# Altium PCB ADCS Subsystem_AVR.PcbDoc
Units mm, origin at the board's own origin, x right, y up, seen from the top; angles counter-clockwise.
Board outline 95.45 x 90.3 mm, 4 copper layers (Top Layer, Ground, Power, Bottom Layer), stack 1.641 mm thick; 83 components, 66 nets, 417 pads, 0 vias.
Unrouted connection lines stored in the file: 173.
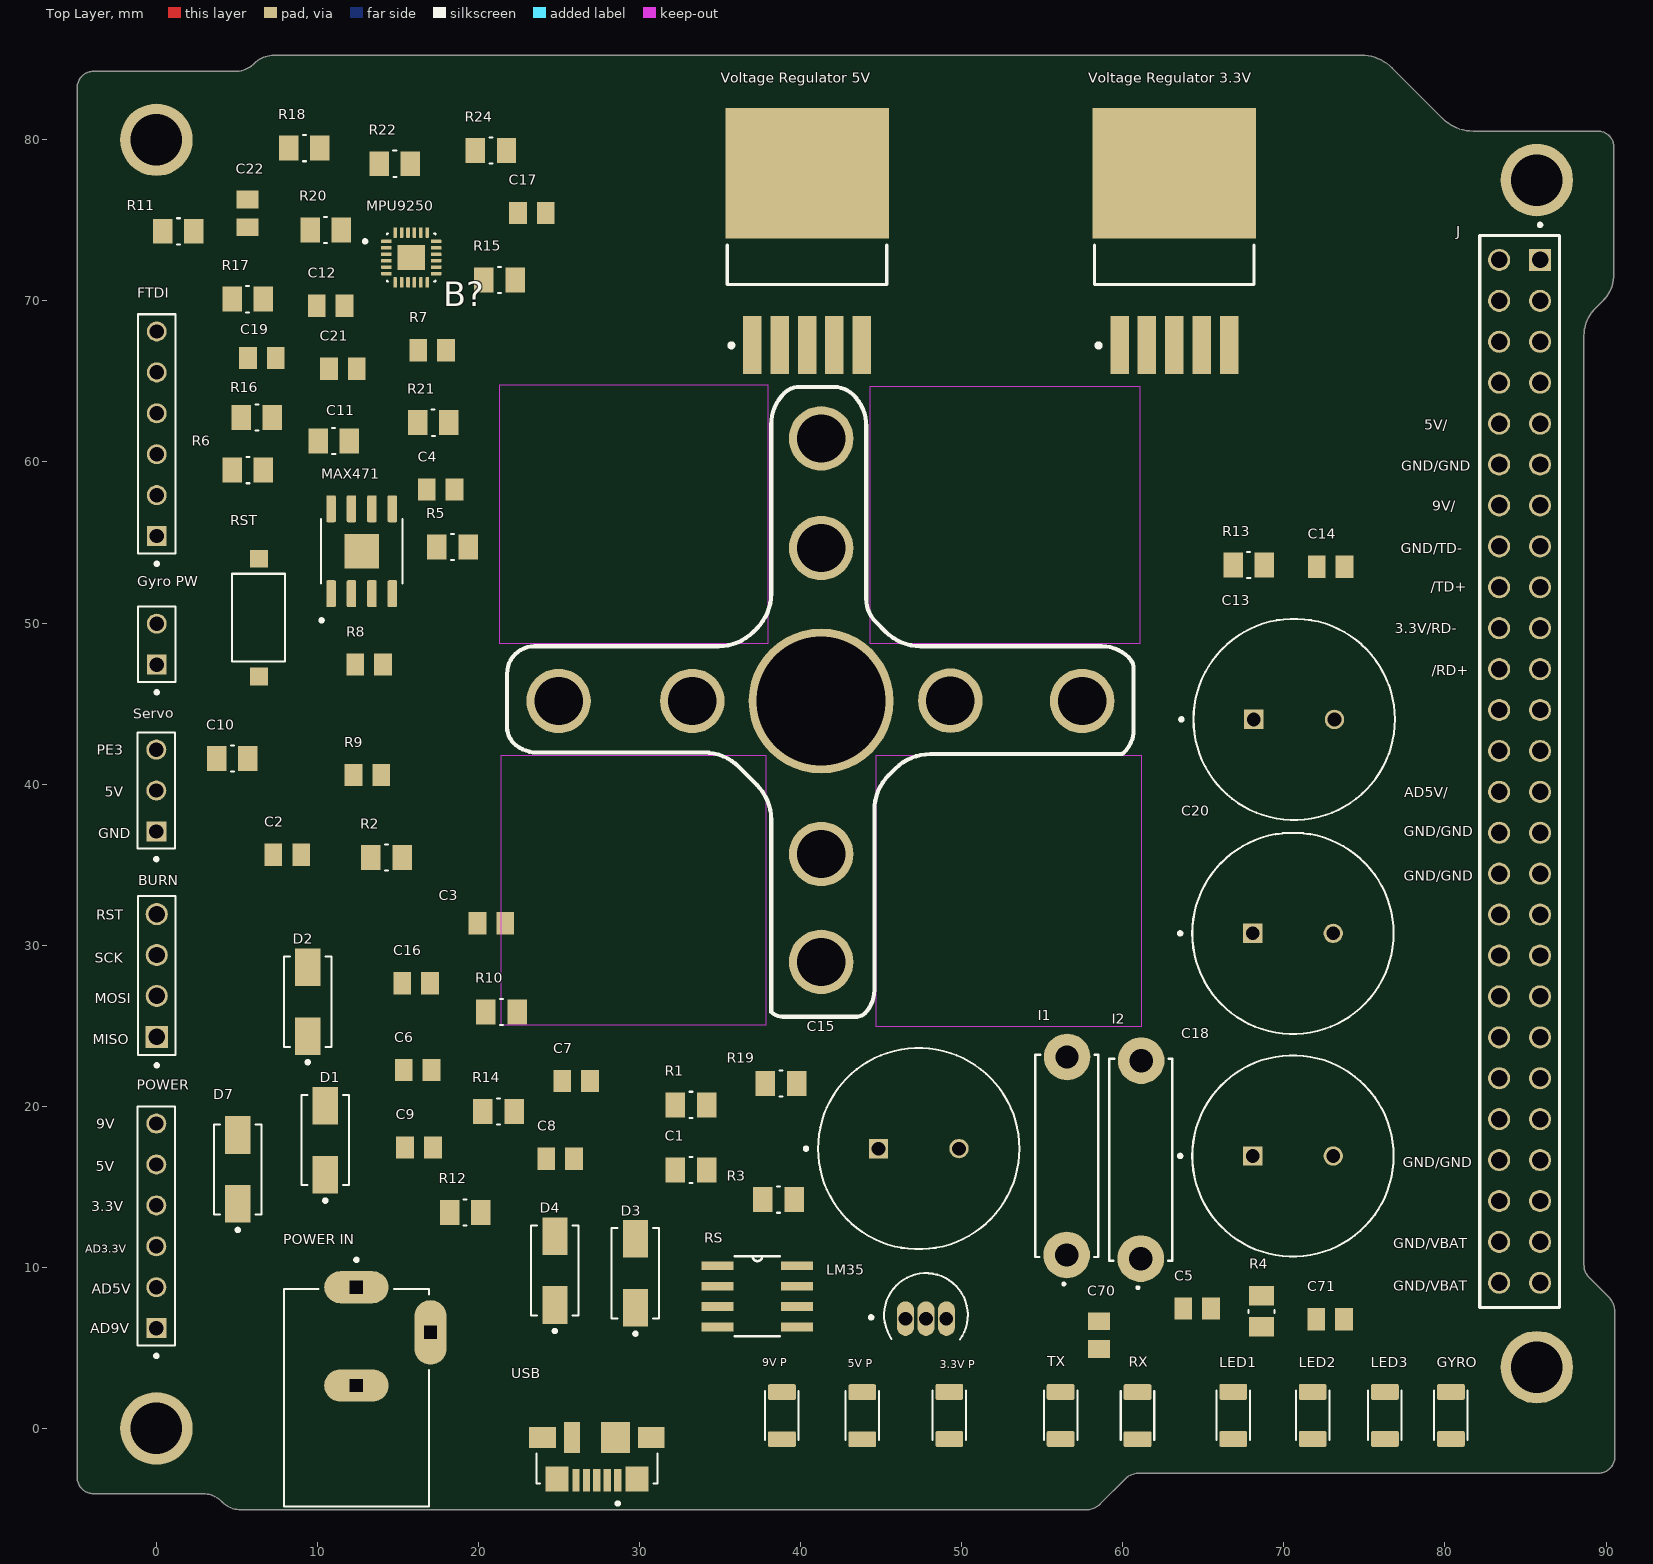
[diagram p0: Top Layer view]
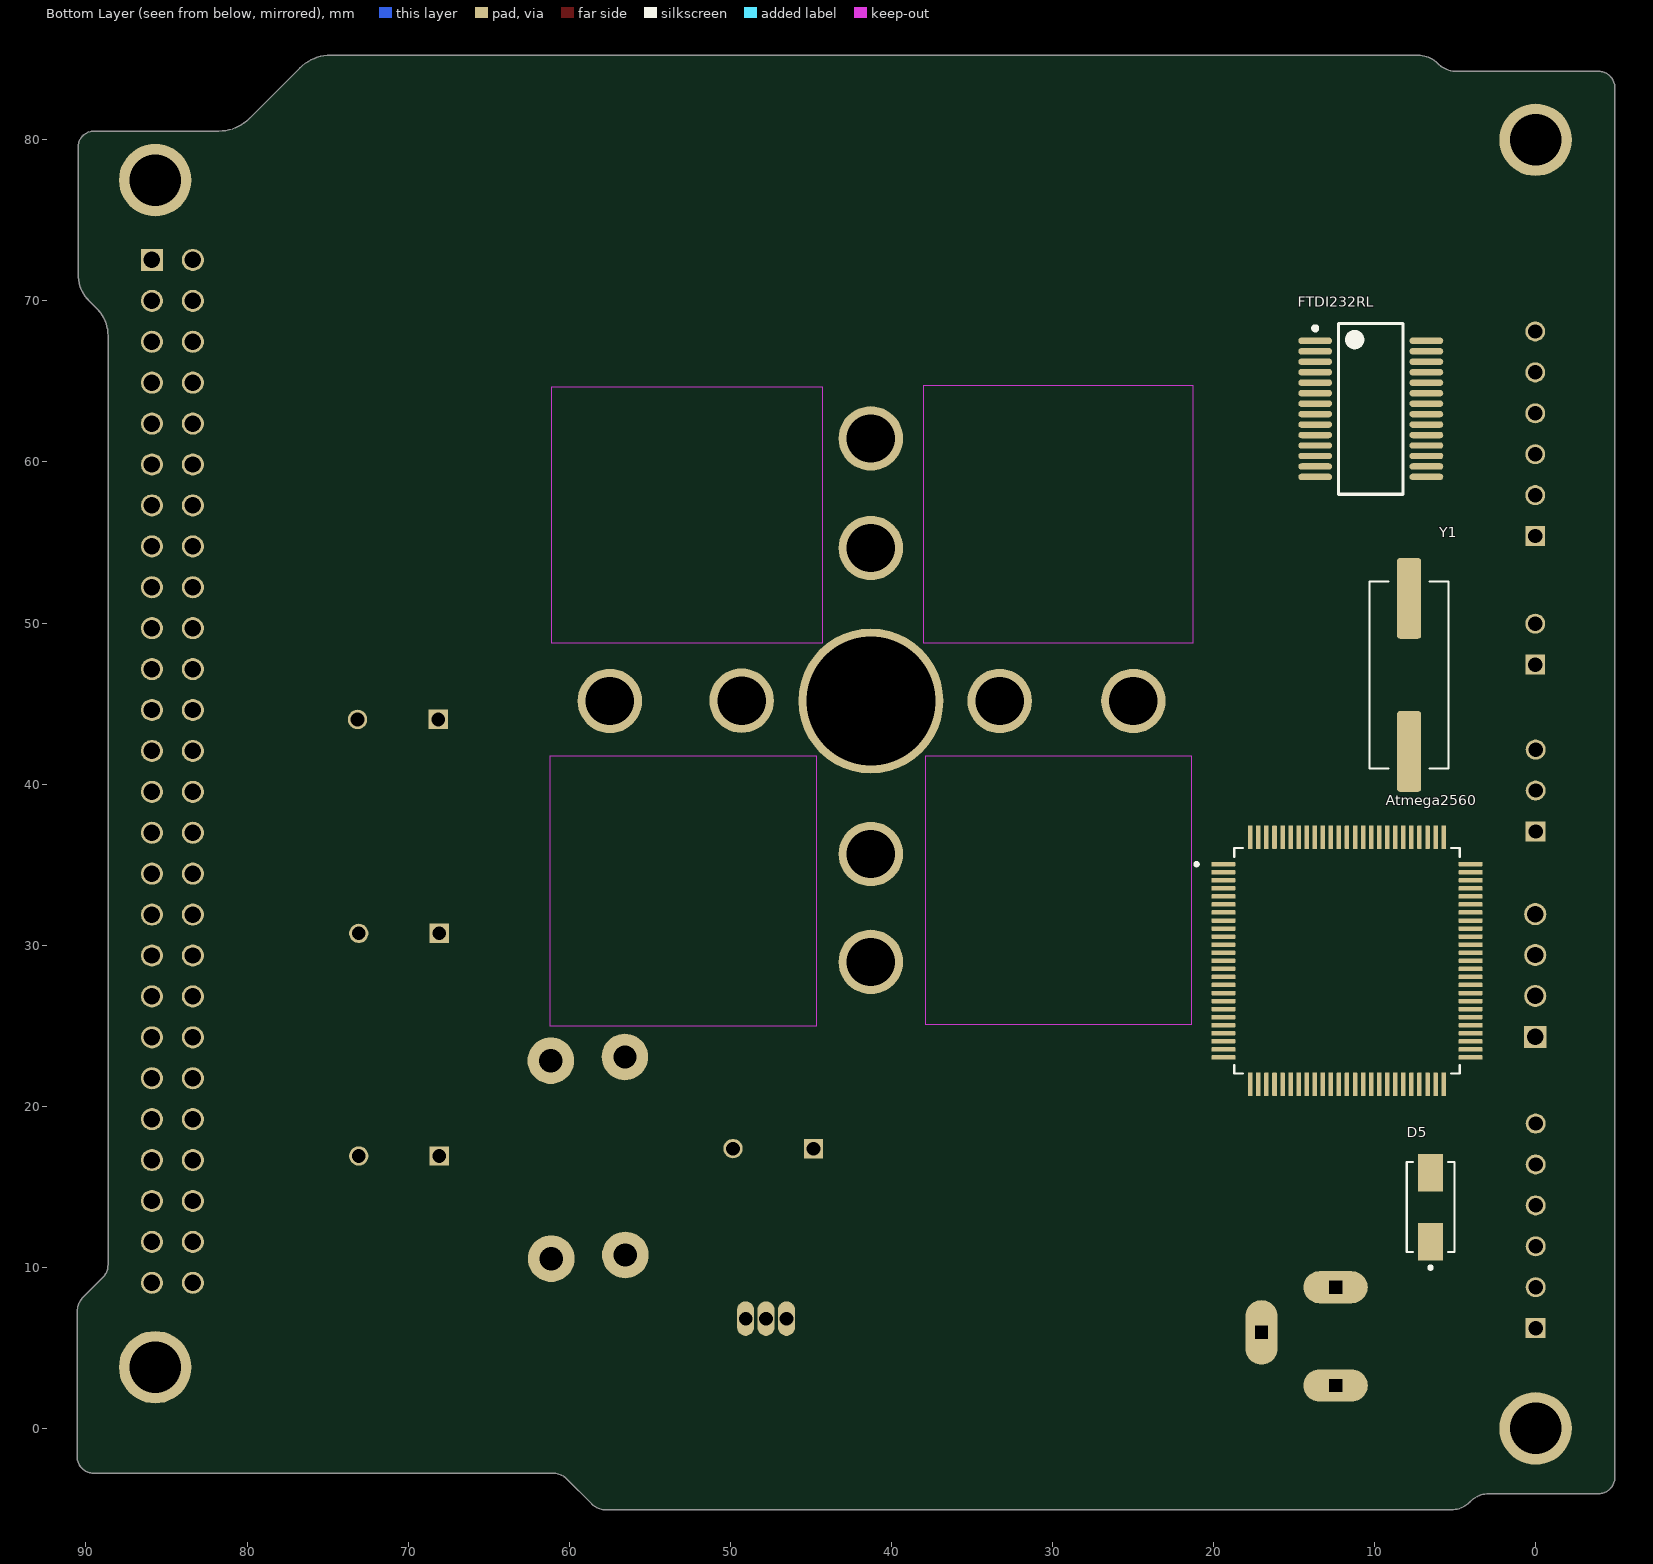
[diagram p1: Bottom Layer view, seen from below]
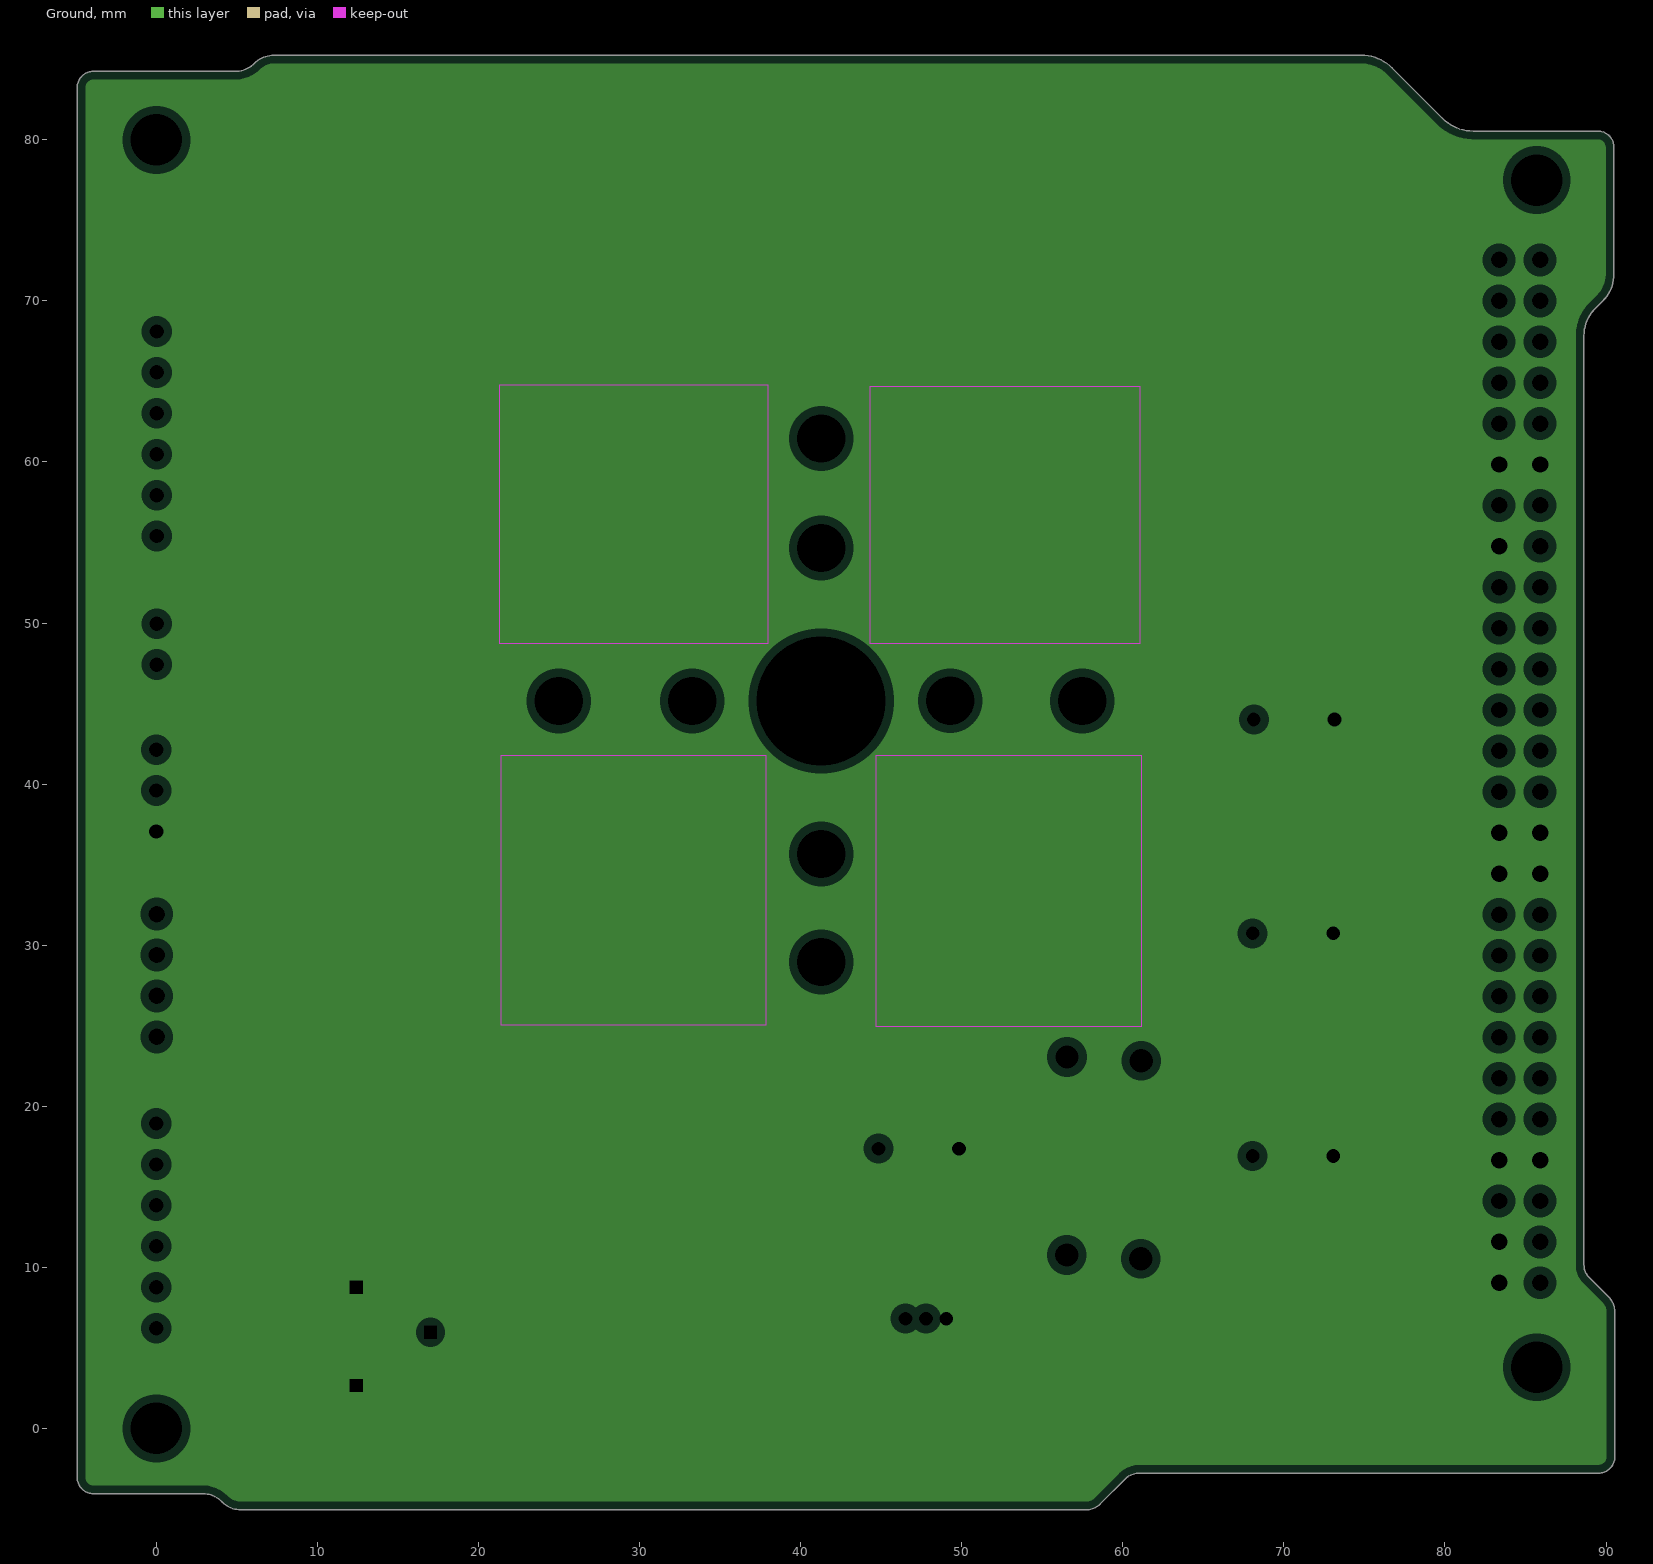
[diagram p2: Ground, clearances drawn from the general rule]
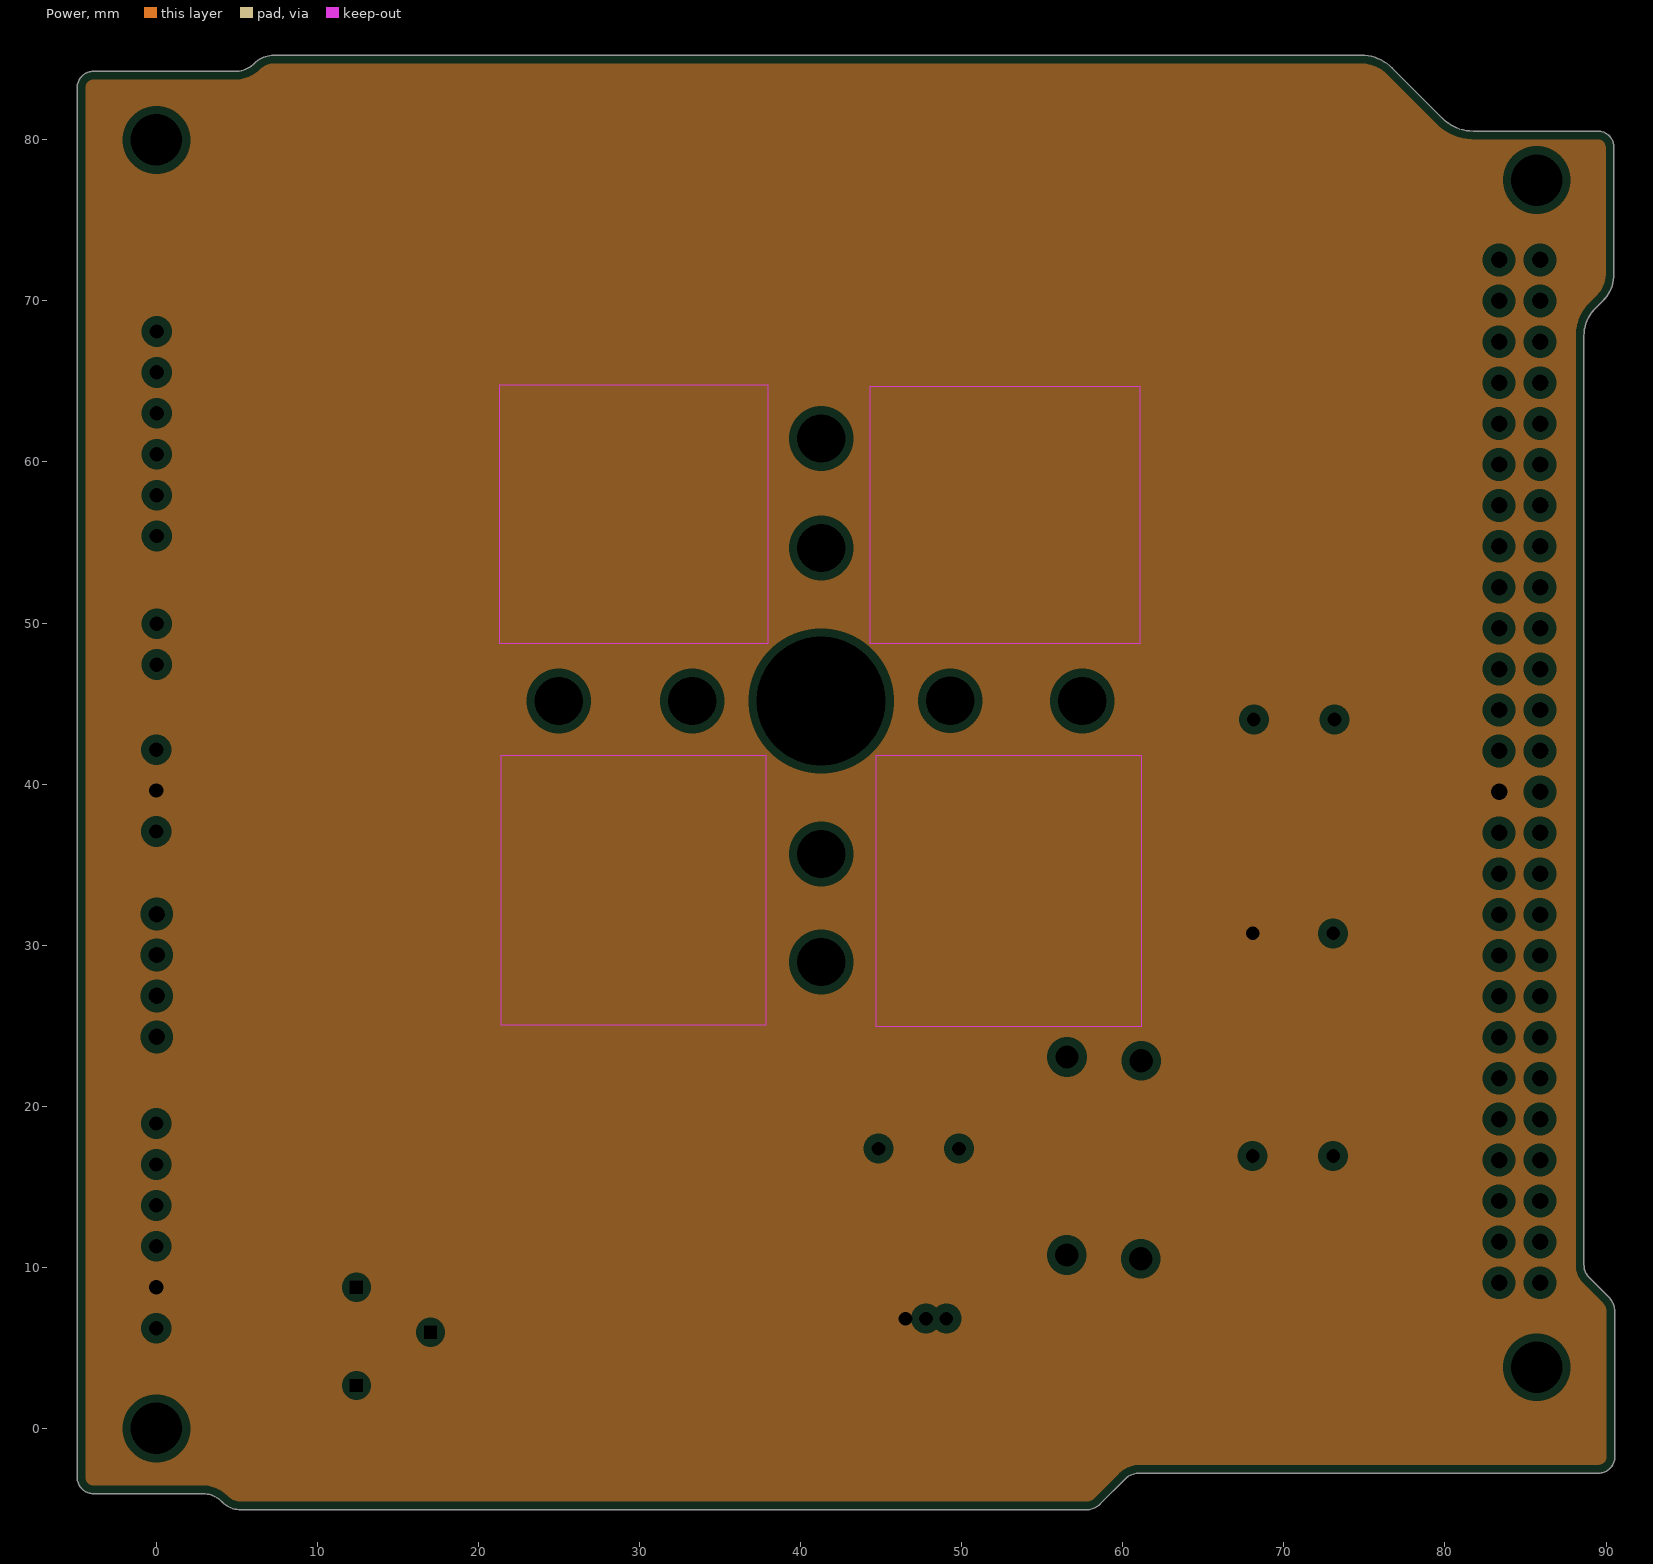
[diagram p3: Power, clearances drawn from the general rule]

## Layer stack, top to bottom
Top Solder: solder mask 0.0102, Solder Resist, Dk 3.5
Top Layer: signal copper 0.0356
Dielectric 1: prepreg 0.1702, FR-4, Dk 4.35
Ground: plane copper 0.0178, net G
Dielectric 3: core 1.1938, FR-4, Dk 4.35
Power: plane copper 0.0178, net VCC-5V(ADCS)
Dielectric 2: prepreg 0.1702, FR-4, Dk 4.35
Bottom Layer: signal copper 0.0356
Bottom Solder: solder mask 0.0102, Solder Resist, Dk 3.5

## Board outline
2.9,-4.05 cw(c2.9,-5.668) 4.044,-4.524 4.096,-4.576 ccw(c5.24,-3.432) 5.24,-5.05 57.73,-5.05 ccw(c57.73,-3.831) 58.592,-4.693 60.158,-3.127 cw(c61.02,-3.989) 61.02,-2.77 89.54,-2.77 ccw(c89.54,-1.77) 90.54,-1.77 90.54,7.25 ccw(c89.248,7.25) 90.162,8.163 89.625,8.7 88.952,9.373 cw(c89.728,10.15) 88.63,10.15 88.63,67.85 cw(c90.996,67.85) 89.323,69.523 89.797,69.997 ccw(c88.124,71.67) 90.49,71.67 90.49,79.54 ccw(c89.49,79.54) 89.49,80.54 81.75,80.54 cw(c81.75,83.22) 79.855,81.325 76.715,84.465 ccw(c74.82,82.57) 74.82,85.25 7.302,85.25 ccw(c7.302,83.543) 6.095,84.75 cw(c4.888,85.957) 4.888,84.25 -3.91,84.25 ccw(c-3.91,83.25) -4.91,83.25 -4.91,-3.05 ccw(c-3.91,-3.05) -3.91,-4.05

## Design rules (kind name [scope] priority, off if disabled: settings)
Clearance [All] p1: gap=0.178 ignorepadtopadclearanceinfootprint=FALSE except(0: Arc-Hole Track-Hole SMDPad-Hole THPad-Hole Via-Hole Fill-Hole Poly-Hole Region-Hole Text-Hole)
ComponentClearance [All] p1: gap=0.762 collisioncheckmode=3 verticalgap=0.762 showdistances=FALSE
DiffPairsRouting [All] p1: maxlimit=0.254 minlimit=0.254 mostfreqgap=0.254 toplayer_minwidth=0.381 toplayer_maxwidth=0.381 toplayer_prefwidth=0.381 bottomlayer_minwidth=0.381 bottomlayer_maxwidth=0.381 bottomlayer_prefwidth=0.381 substack1={0761D619-B0FF-4D42-81BD-1B94FE1A46B2} toplayer_{0761d619-b0ff-4d42-81bd-1b94fe1a46b2}_minwidth=0.381 toplayer_{0761d619-b0ff-4d42-81bd-1b94fe1a46b2}_maxwidth=0.381 toplayer_{0761d619-b0ff-4d42-81bd-1b94fe1a46b2}_prefwidth=0.381 bottomlayer_{0761d619-b0ff-4d42-81bd-1b94fe1a46b2}_minwidth=0.381 bottomlayer_{0761d619-b0ff-4d42-81bd-1b94fe1a46b2}_maxwidth=0.381 bottomlayer_{0761d619-b0ff-4d42-81bd-1b94fe1a46b2}_prefwidth=0.381 maxuncoupledlength=12.7
HoleSize [All] p1: absolutevalues=TRUE maxlimit=3.302 minlimit=0.025 maxpercent=80.000 minpercent=20.000
HoleToHoleClearance [All] p1: gap=0.152 allowstackedmicrovias=TRUE
MinimumSolderMaskSliver [All] p1: minsoldermaskwidth=0.076
PlaneClearance [All] p1: clearance=0.508
PlaneConnect [All] p1: planeconnectstyle=Relief reliefexpansion=0.508 reliefentries=4 reliefconductorwidth=0.254 reliefairgap=0.254
PolygonConnect [All] p1: connectstyle=Relief reliefconductorwidth=0.254 reliefentries=4 polygonreliefangle="90 Angle" airgapwidth=0.254
RoutingVias [All] p1: holewidth=0.305 width=0.61 viastyle="Through Hole" minholewidth=0.254 minwidth=0.254 maxholewidth=0.305 maxwidth=0.61
SilkToSilkClearance [All] p1: silktosilkclearance=0.102
SilkToSolderMaskClearance [IsPad] p1: minsilkscreentomaskgap=0.102 clearancetoexposedcopper=TRUE
SolderMaskExpansion [All] p1: expansion=0.076 istentingtop=FALSE
Width [All] p1: maxlimit=1.016 minlimit=0.254 preferedwidth=0.305 substack1={0761D619-B0FF-4D42-81BD-1B94FE1A46B2} toplayer_{0761d619-b0ff-4d42-81bd-1b94fe1a46b2}_minwidth=0.178 bottomlayer_{0761d619-b0ff-4d42-81bd-1b94fe1a46b2}_minwidth=0.178 minimp=50.000000 maximp=50.000000 favimp=50.000000
21 further rules are at their usual default settings.

## Components (designator, comment, footprint, x,y, rotation, side; value= is the part's Value field where it differs from the comment)
"3.3V P" "(1206) RED" RESC3015X65-01 49.225,0.827 r90 top
"5V P" "(1206) Blue" RESC3015X65-01 43.815,0.813 r90 top
"9V P" "(1206) white" RESC3015X65-01 38.837,0.813 r90 top
Atmega2560 "ATMEGA2560-16AU" QFP50P1600X1600X120-100N 11.713,29.032 r180 bottom
B? "Brushless_motor" brushless_motor_2200KV 21.274,25.161 r0 top
BURN "4 Position PinHeader 1Row" TE_3-644456-4 0.025,24.311 r90 top
C1 "(1206) 22pF" CAPC3216X125N0 33.172,16.104 r0 top
C2 "(0805) 100nF" CAPC2012X95N-0 8.128,35.611 r0 top
C3 "(0805) 100nF" CAPC2012X95N-0 20.803,31.369 r0 top
C4 "(0805) 100nF" CAPC2012X95N-0 17.653,58.293 r0 top
C5 "(0805) 100nF" CAPC2012X95N-0 64.618,7.442 r0 top
C6 "(0805) 10nF" CAPC2012X95N-0 16.216,22.25 r0 top
C7 "(0805) 100nF" CAPC2012X95N-0 26.06,21.565 r0 top
C8 "(0805) 100nF" CAPC2012X95N-0 25.07,16.739 r0 top
C9 "(0805) 100nF" CAPC2012X95N-0 16.307,17.45 r0 top
C10 "(1206) 22pF" CAPC3216X125N0 4.699,41.631 r0 top
C11 "(1206) 22pF" CAPC3216X125N0 10.991,61.356 r0 top
C12 "(0805) 100nf" CAPC2012X95N-0 10.82,69.704 r0 top
C13 "330uF" CAPPRD500W60D1250H2500 70.637,44.018 r0 top
C14 "(0805) 1uF" CAPC2012X95N-0 72.898,53.492 r0 top
C15 "220uF" CAPPRD500W60D1250H2500 47.331,17.374 r0 top
C16 "(0805) 1uF" CAPC2012X95N-0 16.129,27.635 r0 top
C17 "(0805) 1uF" CAPC2012X95N-0 23.317,75.463 r0 top
C18 "330uF" CAPPRD500W60D1250H2500 70.561,16.916 r0 top
C19 "(0805) 1uF" CAPC2012X95N-0 6.553,66.446 r0 top
C20 "220uF" CAPPRD500W60D1250H2500 70.561,30.734 r0 top
C21 "(0805) 1uF" CAPC2012X95N-0 11.582,65.786 r0 top
C22 "(0805) 1uF" CAPC2012X95N-0 5.664,75.438 r90 top
C70 "(0805) 10nF" CAPC2012X95N-0 58.522,5.791 r90 top
C71 "(0805) 100nF" CAPC2012X95N-0 72.873,6.782 r0 top
D1 "SMD Schottky diode 5A/40V" DIOM5227X270N 10.49,17.9 r90 top
D2 "SMD Schottky diode 5A/40V" DIOM5227X270N 9.398,26.492 r90 top
D3 "SMD Schottky diode 5A/40V" DIOM5227X270N 29.743,9.638 r90 top
D4 "SMD Schottky diode 5A/40V" DIOM5227X270N 24.74,9.804 r90 top
D5 "SMD Schottky diode 5A/40V" DIOM5227X270N 6.528,13.741 r90 bottom
D7 "SMD Schottky diode 5A/40V" DIOM5227X270N 5.055,16.078 r90 top
FTDI "6 Position PinHeader 1Row" TE_6-146285-6 0.025,55.401 r90 top
FTDI232RL "IC_FT232RL" SSOP-28 10.236,63.297 r180 bottom
GYRO "(1206) GREEN" RESC3015X65-01 80.366,0.827 r90 top
"Gyro PW" "2 Position PinHeader" TE_2-103327-2 0.043,48.648 r90 top
I1 "47uH" IND 9.398,15.88 r90 top
I2 "47uH" IND 13.995,15.651 r90 top
J "52 Position Elevated Socket Connector" SAMTEC_ESQ-126-39-G-D 85.903,72.542 r90 top locked
LED1 "(1206) Yellow" RESC3015X65-01 66.853,0.827 r90 top
LED2 "(1206) RED" RESC3015X65-01 71.78,0.827 r90 top
LED3 "(1206) Green" RESC3015X65-01 76.268,0.827 r90 top
LM35 "Temperature Sensor" TO92127P521H735-4 47.777,7.595 r0 top
MAX471 "MAX471 IC" SOIC127P600X168-8N 12.751,54.458 r90 top
MPU9250 "MPU-9250" QFN40P300X300X105-25N 15.824,72.695 r0 top
POWER "6 Position PinHeader 1Row" TE_6-146285-6 0,6.227 r90 top
"POWER IN" "Power Socket" GRAVITECH_CON-SOCJ-2155 12.421,2.667 r90 top
R1 "(1206) 65" CAPC3216X125N0 33.172,20.142 r0 top
R2 "(1206) 10k" CAPC3216X125N0 14.275,35.484 r0 top
R3 "(1206) 150" CAPC3216X125N0 38.608,14.249 r0 top
R4 "(1206) 85" CAPC3216X125N0 68.656,7.29 r270 top
R5 "(1206) 510K" CAPC3216X125N0 18.364,54.762 r0 top
R6 "(1206) 510K" CAPC3216X125N0 5.664,59.538 r0 top
R7 "(0805) 100K" CAPC2012X95N-0 17.12,66.929 r0 top
R8 "(0805) 1K" CAPC2012X95N-0 13.208,47.422 r0 top
R9 "(0805) 1K" CAPC2012X95N-0 13.106,40.569 r0 top
R10 "(1206) 300" CAPC3216X125N0 21.412,25.908 r0 top
R11 "(1206) 10K" CAPC3216X125N0 1.346,74.371 r0 top
R12 "(1206) 10K" CAPC3216X125N0 19.152,13.462 r0 top
R13 "(1206) 10K" CAPC3216X125N0 67.793,53.645 r0 top
R14 "(1206) 85" CAPC3216X125N0 21.219,19.733 r0 top
R15 "(1206) 120" CAPC3216X125N0 21.285,71.349 r0 top
R16 "(1206) 65" CAPC3216X125N0 6.223,62.814 r0 top
R17 "(1206) 3.3K" CAPC3216X125N0 5.649,70.151 r0 top
R18 "(1206) 150" CAPC3216X125N0 9.169,79.527 r0 top
R19 "(1206) 150" CAPC3216X125N0 38.76,21.463 r0 top
R20 "(1206) 10K" CAPC3216X125N0 10.49,74.447 r0 top
R21 "(1206) 150" CAPC3216X125N0 17.17,62.484 r0 top
R22 "(1206) 5.6K" CAPC3216X125N0 14.783,78.562 r0 top
R24 "(1206) 330" CAPC3216X125N0 20.752,79.375 r0 top
RS "MAX488ESA+" SOIC127P600X175-8N0 37.313,8.204 r0 top
RST "Tact-Switch" "Tact Switch" 6.375,46.685 r90 top
RX "(1206) Blue" RESC3015X65-01 60.909,0.813 r90 top
Servo "3 Position PinHeader 1Row" TE_3-103327-3 0,37.062 r90 top
TX "(1206) Green" RESC3015X65-01 56.134,0.827 r90 top
USB "USB Connectors MICRO USB B" MOLEX_47346-0001 27.349,-0.559 r180 top
"Voltage Regulator 3.3V" "Voltage Regulator" TO-263-5 63.195,73.711 r90 top
"Voltage Regulator 5V" "Voltage Regulator" TO-263-5 40.396,73.711 r90 top
Y1 "Crystal-16MHZ" XTAL1140X490X430N-0 7.82,46.787 r90 bottom

## Footprints (in the part's own frame and the unit in brackets; to place one, negate y for a bottom-side part, rotate by r counter-clockwise, add the part's x,y. Pads: shape width x height; smd on the part's side, far side on the other; paste and mask are expansions set on the pad)
brushless_motor_2200KV [mm] "bushless motor mounting base"
  round 9 hole 8 unplated: 1(20,20)
  round 4 hole 3 unplated: 2(28.02,20.02) 3(12,20) 4(20,29.5) 5(20,10.5) 6(20,36.3) 7(20,3.8) 8(3.7,20) 9(36.2,20)
  Keep-Out Layer region: 0,23.6 16.7,23.6 16.7,39.6 0,39.6
  Keep-Out Layer region: 23,23.6 39.8,23.6 39.8,39.5 23,39.5
  Keep-Out Layer region: 23.4,-0.205 39.905,-0.205 39.905,16.6 23.4,16.6
  Keep-Out Layer region: 0.1,-0.1 16.6,-0.1 16.6,16.6 0.1,16.6
  silkscreen extent 0.5,0.4 39.4,39.5, body extent -3.71,-3.57 43.61,43.75, height 40.01
CAPC2012X95N-0 [mm]
  rect 1.1x1.38 smd: 1(-0.863,0) 2(0.863,0)
  body extent -1.6,-0.8 1.6,0.8, height 1.2
CAPC3216X125N0 [mm]
  rect 1.21x1.55 smd: 1(-0.95,-0.048) 2(0.987,-0.048)
  silkscreen extent -0.08,-0.86 0.12,0.76, body extent -1.58,-0.84 1.62,0.76, height 1.25
CAPPRD500W60D1250H2500 [mm]
  round 1.2 hole 0.85: N(2.5,0)
  rect 1.2x1.2 hole 0.85: P(-2.5,0)
  silkscreen extent -7.1,-6.25 6.25,6.25, body extent -6.25,-6.25 6.25,6.25, height 25
DIOM5227X270N [mm]
  rect 2.33x1.56 smd: A(2.14,0) C(-2.14,0)
  silkscreen extent -3.85,-1.48 2.8,1.48, body extent -2.6,-1.36 2.6,1.36, height 2.7
GRAVITECH_CON-SOCJ-2155 [mm]
  oval 2x4 hole 0.8 square: 1(6.1,0) 3(0,0)
  oval 4x2 hole 0.8 square: 2(3.3,-4.6)
  silkscreen extent -7.5,-4.5 7.9,4.5, body extent -7.56,-4.57 6.54,4.68, height 11.1
IND [mil]
  round 114 hole 57: 1(-201.2,-1855) 2(282.8,-1856)
  silkscreen extent -275,-1932 288,-1778, body extent -172,-1912 253,-1794, height 118
MOLEX_47346-0001 [mm]
  rect 0.45x1.38 smd: 1(-1.3,2.66) 2(-0.65,2.66) 3(0,2.66) 4(0.65,2.66) 5(1.3,2.66)
  rect 1.425x1.55 smd: S1(-2.488,2.575) S2(2.488,2.575)
  rect 1.65x1.3 smd: S3(-3.375,0) S6(3.375,0)
  rect 1.8x1.9 smd: S4(-1.15,0)
  rect 1x1.9 smd: S5(1.55,0)
  silkscreen extent -3.75,1 3.75,4.2, body extent -4.18,-2.54 4.18,2.89, height 2.62
QFN40P300X300X105-25N [mm]
  rrect25% 0.64x0.22 smd: 1(-1.545,1) 2(-1.545,0.6) 3(-1.545,0.2) 4(-1.545,-0.2) 5(-1.545,-0.6) 6(-1.545,-1) 13(1.545,-1) 14(1.545,-0.6) 15(1.545,-0.2) 16(1.545,0.2) 17(1.545,0.6) 18(1.545,1)
  rrect25% 0.22x0.64 smd: 7(-1,-1.545) 8(-0.6,-1.545) 9(-0.2,-1.545) 10(0.2,-1.545) 11(0.6,-1.545) 12(1,-1.545) 19(1,1.545) 20(0.6,1.545) 21(0.2,1.545) 22(-0.2,1.545) 23(-0.6,1.545) 24(-1,1.545)
  rect 1.7x1.54 smd paste-2: 25(0,0)
  silkscreen extent -2.96,-1.5 1.5,1.5, body extent -1.5,-1.5 1.5,1.5, height 1
QFP50P1600X1600X120-100N [mm]
  rrect25% 1.47x0.28 smd mask+0.05: 1(-7.67,6) 2(-7.67,5.5) 3(-7.67,5) 4(-7.67,4.5) 5(-7.67,4) 6(-7.67,3.5) 7(-7.67,3) 8(-7.67,2.5) 9(-7.67,2) 10(-7.67,1.5) 11(-7.67,1) 12(-7.67,0.5) 13(-7.67,0) 14(-7.67,-0.5) 15(-7.67,-1) 16(-7.67,-1.5) 17(-7.67,-2) 18(-7.67,-2.5) 19(-7.67,-3) 20(-7.67,-3.5) 21(-7.67,-4) 22(-7.67,-4.5) 23(-7.67,-5) 24(-7.67,-5.5) 25(-7.67,-6) 51(7.67,-6) 52(7.67,-5.5) 53(7.67,-5) 54(7.67,-4.5) 55(7.67,-4) 56(7.67,-3.5) 57(7.67,-3) 58(7.67,-2.5) 59(7.67,-2) 60(7.67,-1.5) 61(7.67,-1) 62(7.67,-0.5) 63(7.67,0) 64(7.67,0.5) 65(7.67,1) 66(7.67,1.5) 67(7.67,2) 68(7.67,2.5) 69(7.67,3) 70(7.67,3.5) 71(7.67,4) 72(7.67,4.5) 73(7.67,5) 74(7.67,5.5) 75(7.67,6)
  rrect25% 0.28x1.47 smd mask+0.05: 26(-6,-7.67) 27(-5.5,-7.67) 28(-5,-7.67) 29(-4.5,-7.67) 30(-4,-7.67) 31(-3.5,-7.67) 32(-3,-7.67) 33(-2.5,-7.67) 34(-2,-7.67) 35(-1.5,-7.67) 36(-1,-7.67) 37(-0.5,-7.67) 38(0,-7.67) 39(0.5,-7.67) 40(1,-7.67) 41(1.5,-7.67) 42(2,-7.67) 43(2.5,-7.67) 44(3,-7.67) 45(3.5,-7.67) 46(4,-7.67) 47(4.5,-7.67) 48(5,-7.67) 49(5.5,-7.67) 50(6,-7.67) 76(6,7.67) 77(5.5,7.67) 78(5,7.67) 79(4.5,7.67) 80(4,7.67) 81(3.5,7.67) 82(3,7.67) 83(2.5,7.67) 84(2,7.67) 85(1.5,7.67) 86(1,7.67) 87(0.5,7.67) 88(0,7.67) 89(-0.5,7.67) 90(-1,7.67) 91(-1.5,7.67) 92(-2,7.67) 93(-2.5,7.67) 94(-3,7.67) 95(-3.5,7.67) 96(-4,7.67) 97(-4.5,7.67) 98(-5,7.67) 99(-5.5,7.67) 100(-6,7.67)
  silkscreen extent -9.44,-7 7,7, body extent -8,-8 8,8, height 1.12
RESC3015X65-01 [mm]
  rrect20% 0.98x1.72 smd: 1(-1.479,-0.004) 2(1.441,-0.004)
  silkscreen extent -1.54,-1.04 1.52,1.04, body extent -1.63,-0.8 1.57,0.8, height 1.1
SAMTEC_ESQ-126-39-G-D [mm]
  rect 1.37x1.37 hole 1.02: 01(0,0)
  round 1.37 hole 1.02: 02(0,2.54) 03(-2.54,0) 04(-2.54,2.54) 05(-5.08,0) 06(-5.08,2.54) 07(-7.62,0) 08(-7.62,2.54) 09(-10.16,0) 10(-10.16,2.54) 11(-12.7,0) 12(-12.7,2.54) 13(-15.24,0) 14(-15.24,2.54) 15(-17.78,0) 16(-17.78,2.54) 17(-20.32,0) 18(-20.32,2.54) 19(-22.86,0) 20(-22.86,2.54) 21(-25.4,0) 22(-25.4,2.54) 23(-27.94,0) 24(-27.94,2.54) 25(-30.48,0) 26(-30.48,2.54) 27(-33.02,0) 28(-33.02,2.54) 29(-35.56,0) 30(-35.56,2.54) 31(-38.1,0) 32(-38.1,2.54) 33(-40.64,0) 34(-40.64,2.54) 35(-43.18,0) 36(-43.18,2.54) 37(-45.72,0) 38(-45.72,2.54) 39(-48.26,0) 40(-48.26,2.54) 41(-50.8,0) 42(-50.8,2.54) 43(-53.34,0) 44(-53.34,2.54) 45(-55.88,0) 46(-55.88,2.54) 47(-58.42,0) 48(-58.42,2.54) 49(-60.96,0) 50(-60.96,2.54) 51(-63.5,0) 52(-63.5,2.54)
  silkscreen extent -65.02,-1.2 2.27,3.75, body extent -65.15,-1.27 1.4,3.81, height 8.51
SOIC127P600X168-8N [mm]
  rrect25% 1.66x0.59 smd: 1(-2.63,1.905) 2(-2.63,0.635) 3(-2.63,-0.635) 4(-2.63,-1.905) 5(2.63,-1.905) 6(2.63,-0.635) 7(2.63,0.635) 8(2.63,1.905)
  rect 2.135x2.135 smd paste-2: 9(0,0)
  silkscreen extent -4.39,-2.52 1.99,2.59, body extent -3,-2.45 3,2.45, height 1.75
SOIC127P600X175-8N0 [mil]
  rect 78x21 smd: 1(-97,75) 2(-97,25) 3(-97,-25) 4(-97,-75) 5(97,-75) 6(97,-25) 7(97,25) 8(97,75)
  silkscreen extent -55,-98 55,98, body extent -124,-97 113,95, height 67
SSOP-28 [mm] "28-Pin SSOP 0.65 mm Pitch"
  oval 2.1x0.4 smd: 1(-3.45,4.225) 2(-3.45,3.575) 3(-3.45,2.925) 4(-3.45,2.275) 5(-3.45,1.625) 6(-3.45,0.975) 7(-3.45,0.325) 8(-3.45,-0.325) 9(-3.45,-0.975) 10(-3.45,-1.625) 11(-3.45,-2.275) 12(-3.45,-2.925) 13(-3.45,-3.575) 14(-3.45,-4.225) 15(3.45,-4.225) 16(3.45,-3.575) 17(3.45,-2.925) 18(3.45,-2.275) 19(3.45,-1.625) 20(3.45,-0.975) 21(3.45,-0.325) 22(3.45,0.325) 23(3.45,0.975) 24(3.45,1.625) 25(3.45,2.275) 26(3.45,2.925) 27(3.45,3.575) 28(3.45,4.225)
  silkscreen extent -3.57,-5.3 2,5.3, body extent -2.7,-5.3 2.7,5.3, height 2
"Tact Switch" [mm] "High Quality 3x6x2.7 mm SMD White Push Button Switch (Tact Switch)"
  rect 1.1x1.1 smd: 1(0,0) 2(7.3,0)
  silkscreen extent 0.91,-1.63 6.38,1.68, body extent -1.35,-1.72 8.62,1.78, height 4
TE_2-103327-2 [mm]
  rect 1.24x1.24 hole 0.89: 1(-1.227,0.018)
  round 1.24 hole 0.89: 2(1.313,0.018)
  silkscreen extent -3.05,-1.15 2.38,1.19, body extent -2.32,-1.11 2.36,1.22, height 5.84
TE_3-103327-3 [mm]
  rect 1.24x1.24 hole 0.89: 1(0,0)
  round 1.24 hole 0.89: 2(2.54,0) 3(5.08,0)
  silkscreen extent -1.82,-1.17 6.15,1.17, body extent -1.31,-1.2 6.31,1.21, height 8.18
TE_3-644456-4 [mm]
  rect 1.37x1.37 hole 1.02: 1(0,0)
  round 1.37 hole 1.02: 2(2.54,0) 3(5.08,0) 4(7.62,0)
  silkscreen extent -1.87,-1.17 8.74,1.17, body extent -1.14,-1.14 8.72,1.19, height 10.03
TE_6-146285-6 [mm]
  rect 1.24x1.24 hole 0.89: 1(0,0)
  round 1.24 hole 0.89: 2(2.54,0) 3(5.08,0) 4(7.62,0) 5(10.16,0) 6(12.7,0)
  silkscreen extent -1.82,-1.17 13.77,1.17, body extent -1.07,-1.14 13.77,1.14, height 8.1
TO92127P521H735-4 [mm]
  oval 1.07x2.14 hole 0.85: 1(-1.27,-0.775) 2(0,-0.775) 3(1.27,-0.775)
  silkscreen extent -3.5,-2.08 2.6,2.04, body extent -2.4,-2.29 2.39,1.64, height 5.69
TO-263-5 [mm] "D2-PAK, 6-Pads, Body 8,9x9,9mm (max), IPC Low Density"
  rect 3.6x1.15 smd: 1(-6.45,3.4) 2(-6.45,1.7) 3(-6.45,0) 4(-6.45,-1.7) 5(-6.45,-3.4)
  rect 8.1x10.15 smd paste-5: 6(4.2,0)
  silkscreen extent -6.6,-4.95 -0.25,4.95, body extent -7.31,-5.08 7.33,5.08, height 4.57
XTAL1140X490X430N-0 [mm]
  rrect25% 5.01x1.51 smd: 1(-4.757,0.04) 2(4.743,0.04)
  silkscreen extent -5.81,-2.41 5.79,2.49, body extent -6.62,-2.35 6.58,2.45, height 4.3

## Part data
"3.3V P" "5V P" "9V P" GYRO LED1 LED2 LED3 RX TX: library part "LED 1206", "LED SMD 1206 High Quality Forward Voltage: 3.2 V / Brightness: 700 mcd", Emitting Color=Amber, Forward Voltage=2V, Manufacturer="Wurth Elektronik", Manufacturer Part Number=150060AS75003, Operating Temperature max.=100C, Operating Temperature min.=-40C, Chip Technology=AlInGaP, ComponentLink1Description="Manufacturer Link", ComponentLink1URL=http://www.we-online.de, ComponentLink2Description=Datasheet, ComponentLink2URL=https://www.we-online.com/catalog/datasheet/150060AS75003.pdf, Dominant Wavelength=605nm, Height=0.7mm, Length=1.6mm, Luminous Intensity=350mcd, Mounting Technology=SMT, Packaging="Tape and Reel", Peak Wavelength=610nm, Size=0603, Viewing Angle=140°, Width=0.8mm
Atmega2560: Package=None, Availability=Unavailable, MP=ATMEGA2560-16AU, Price=None
B?: library part Brushless_Motor
BURN: "Conn Unshrouded Header HDR 4 POS 2.54mm Solder ST Thru-Hole Bag/Box", Package=None, Availability=Warning, Centerline_Pitch="2.54 mm[.1 in]", DigiKey-Purchase-URL=https://snapeda.com/shop?store=DigiKey&id=482664, EU_RoHS_Compliance=Compliant, MF="TE Connectivity", Mouser-Purchase-URL=https://snapeda.com/shop?store=Mouser&id=482664, MP=3-644456-4, Number_of_Positions=4, Price=None, Product_Type=Connector, SnapEDA_Link=https://www.snapeda.com/parts/3-644456-4/TE%20Connectivity%20AMP%20Connectors/view-part/482664/?ref=snap
C1 C10 C11: library part "Capacitor 1206", "UMF316B7103KFHT/1206 Capacitor", Package=None, Availability=Unavailable, MP=UMF316B7103KFHT, Price=None
C2 C3 C4 C5 C6 C7 C8 C9 C12 C14 C16 C17 C19 C21 C22 C70 C71: library part "Capacitor 0805", "UMK212SD103KD-T/CAP CER 10000PF 50V 0805", Package=None, Availability=Unavailable, MP=UMK212SD103KD-T, Price=None
C13 C15 C18 C20: library part "Aluminum Electrolytic Capacitor", "Aluminum Electrolytic Capacitors - Radial Leaded 47uF 250volts AEC-Q200", Package="RADIAL-2 Panasonic", Availability="In Stock", Check_prices=https://www.snapeda.com/parts/EEUEB2E470B/Panasonic/view-part/?ref=eda, MF=Panasonic, MP=EEUEB2E470B, Price=None, SnapEDA_Link=https://www.snapeda.com/parts/EEUEB2E470B/Panasonic/view-part/?ref=snap
D1 D2 D3 D4 D5 D7: "S1 Series 1000 V 1 A 1 uA Surface Mount General Purpose Rectifier - DO-214AC", Package=None, Availability=Unavailable, MP=S1M, Price=None
FTDI POWER: "Connector Header Through Hole 6 position 0.100 (2.54mm)", Package=None, Digi-Key_Part_Number=A122872-ND, DigiKey-Purchase-URL=https://snapeda.com/shop?store=DigiKey&id=2411669, EU_RoHS_Compliance=Compliant, MF="TE Connectivity", MP=5-146285-6, SnapEDA_Link=https://www.snapeda.com/parts/5-146285-6/TE%20Connectivity%20AMP%20Connectors/view-part/2411669/?ref=snap
FTDI232RL: "FT232R USB UART"
"Gyro PW": "Cabezal del conector Agujero pasante 2 posiciones 0,100 (2,54 mm)", Package=None, Availability=Warning, Check_prices=https://www.snapeda.com/parts/4-103327-4/TE%20Connectivity%20AMP%20Connectors/view-part/2403998/?ref=eda, EU_RoHS_Compliance=Compliant, MF="TE Connectivity", MP=4-103327-4, Price=None, Purchase-URL=https://pricing.snapeda.com/search/part/4-103327-4/?ref=eda, SnapEDA_Link=https://www.snapeda.com/parts/4-103327-4/TE%20Connectivity%20AMP%20Connectors/view-part/2403998/?ref=snap
I1 I2: library part "Inductor DIP"
J: "ESQ-126-39-G-D/52 Position Elevated Socket Connector Through Hole", Package=None, Availability=Unavailable, MF=Samtec, MP=ESQ-126-39-G-D, Price=None, SnapEDA_Link=https://www.snapeda.com/parts/ESQ-126-39-G-D/Samtec%20Inc./view-part/490181/?ref=snap
LM35: library part "LM35DZ/NOPB/Temperature Sensor", "LM35DZ/NOPB/Temperature Sensor Analog, Local 0Â°C ~ 100Â°C 10mV/Â°C TO-92-3", Package="E-PKG AXIAL-LEADED-2 ON Semiconductor", Availability="Not in stock", Check_prices=https://www.snapeda.com/parts/LM35DZ/Texas+Instruments/view-part/?ref=eda, MF="Texas Instruments", MP=LM35DZ, Price=None, SnapEDA_Link=https://www.snapeda.com/parts/LM35DZ/Texas+Instruments/view-part/?ref=snap
MPU9250: "MPU-9250 series Accelerometer, Gyroscope, Humidity, Magnetometer, Pressure, Temperature Sensor Evaluation Board", Package="TFQFN-24 TDK InvenSense", Availability="In Stock", Check_prices=https://www.snapeda.com/parts/MPU-9250/TDK+InvenSense/view-part/?ref=eda, MF="TDK InvenSense", MP=MPU-9250, Price=None, Purchase-URL=https://pricing.snapeda.com/search/part/MPU-9250/?ref=eda, SnapEDA_Link=https://www.snapeda.com/parts/MPU-9250/TDK+InvenSense/view-part/?ref=snap
"POWER IN": "CON-SOCJ-2155\DC Power Connectors Power Jack/Connector 2.1mm x 5.5mm", Package=None, Availability=Unavailable, MP=CON-SOCJ-2155, Price=None
R1 R2 R3 R4 R5 R6 R10 R11 R12 R13 R14 R15 R16 R17 R18 R19 R20 R21 R22 R24: library part "Resistor 1206"
R7 R8 R9: library part "Resistor 0805"
RS: "1/1 Transceiver Full RS422, RS485 8-SOIC", Package="SOIC-8 Maxim", Availability=Unavailable, MF="Maxim Integrated", MP=MAX488ESA+T, Price=None, SnapEDA_Link=https://www.snapeda.com/parts/MAX488ESA+T/Maxim%20Integrated/view-part/48834/?ref=snap
RST: "High Quality 3x6x2.7 mm SMD White Push Button Switch (Tact Switch)", Package=None, Availability=Unavailable, MP=1437566-3, Price=None
Servo: "Conn Unshrouded Header HDR 3 POS 2.54mm Solder ST Thru-Hole Carton", Package=None, Availability=Unavailable, EU_RoHS_Compliance=Compliant, MF="TE Connectivity", MP=4-103327-5, Price=None, SnapEDA_Link=https://www.snapeda.com/parts/4-103327-5/TE%20Connectivity%20AMP%20Connectors/view-part/2403997/?ref=snap, TE_purchase_URL=https://www.te.com/usa-en/product-4-103327-5.html?te_bu=Cor&te_type=disp&te_campaign=seda_glo_cor-seda-global-disp-prtnr-fy19-seda-model-bom-cta_sma-317_1&elqCampaignId=32493
USB: "USB Connectors MICRO USB B RECPT BTTM MOUNT ASSY", Package=None, Availability=Warning, Check_prices=https://www.snapeda.com/parts/47346-0001/Molex/view-part/53503/?ref=eda, MF=Molex, MP=47346-0001, Price=None, Purchase-URL=https://pricing.snapeda.com/search/part/47346-0001/?ref=eda, SnapEDA_Link=https://www.snapeda.com/parts/47346-0001/Molex/view-part/53503/?ref=snap
"Voltage Regulator 3.3V" "Voltage Regulator 5V": "TO-263-5/XL4015E1 5A 75W Adjustable DC/DC STEP DOWN CONVERTER Regulator IC SMD"

## Free pads (board coordinates)
  round 4.5 hole 3.2 unplated: 1(0,0) 2(0,80) 3(85.7,77.5) 4(85.7,3.8)

## Nets (pads, with @x,y where several pads share a name; then routed paths per layer and width w, separated by ;. In a path a pad name is that pad's centre, name@x,y a point inside that pad or via, vN(x,y) a via of type N, cw(c..) or ccw(c..) an arc to the next point about the centre after c; other vN are vias at no path point)
3.3V: J.20 POWER.4
5V: J.10 POWER.5
9V: J.14 POWER.6
AREF: Atmega2560.98 C9.2
CTS: FTDI232RL.11
DTR: FTDI232RL.2 FTDI.5
DTRR: C1.2 FTDI.6
FTDI3.3V: C71.1 FTDI232RL.17
FTRXD: FTDI232RL.5 FTDI.3
FTTXD: FTDI232RL.1 FTDI.1
G: "3.3V P.2" "5V P.2" "9V P.2" "POWER IN.1" "POWER IN.3" "Voltage Regulator 3.3V.1" "Voltage Regulator 5V.1" Atmega2560.11 Atmega2560.32 Atmega2560.62 Atmega2560.81 Atmega2560.99 C2.1 C3.1 C4.1 C5.1 C6.1 C7.1 C8.1 C9.1 C10.1 C11.1 C12.2 C13.N C14.2 C15.N C16.2 C18.N C19.2 C20.N C21.2 C70.1 C71.2 D2.A D4.A FTDI232RL.7 FTDI232RL.18 FTDI232RL.21 FTDI232RL.25 FTDI232RL.26 GYRO.2 J.11 J.12 J.16 J.29 J.30 J.31 J.32 J.45 J.46 J.50 J.52 LED1.2 LED2.2 LED3.2 LM35.3 MAX471.1 MAX471.4 MPU9250.18 MPU9250.20 R9.1 R17.1 R24.1 RS.4 RST.1 Servo.1 USB.5
"Gyro On": "Gyro PW.1" C6.2 C7.2 MPU9250.1 MPU9250.8 MPU9250.13 R1.1
MISO: Atmega2560.22 BURN.1
MOSI: Atmega2560.21 BURN.2
NC: FTDI232RL.8 FTDI232RL.24
"Net3.3V P_1": "3.3V P.1" R16.2
"Net5V P_1": "5V P.1" R14.2
"Net9V P_1": "9V P.1" R10.2
NetC8_2: C8.2 MPU9250.10
NetC13_P: C13.P C14.1 D3.A I1.2 R13.2
NetC17_2: "Voltage Regulator 5V.4" C17.2
NetC18_P: C18.P C19.1 D5.A I2.2 R20.2
NetC22_2: "Voltage Regulator 3.3V.4" C22.2
NetD1_A: "POWER IN.2" D1.A
NetD2_C: "Voltage Regulator 5V.3" D2.C I1.1
NetD4_C: "Voltage Regulator 3.3V.3" D4.C I2.1
NetGYRO_1: GYRO.1 R1.2
NetLED1_1: LED1.1 R18.2
NetLED2_1: LED2.1 R19.2
NetLED3_1: LED3.1 R21.2
NetMAX471_2: MAX471.2 MAX471.3
NetMAX471_5: MAX471.5 R7.1
NetMAX471_8: MAX471.8 R8.2
NetR3_2: R3.2 TX.1
NetR4_2: R4.2 RX.1
NetR5_1: R5.1 R6.2
NetR8_1: R8.1 R9.2
NetR13_1: "Voltage Regulator 5V.2" R13.1 R17.2
NetR20_1: "Voltage Regulator 3.3V.2" R20.1 R22.2
NetR22_1: R22.1 R24.2
PE3: Atmega2560.5 Servo.3
PE4: Atmega2560.6 R18.1
PE5: Atmega2560.7 R19.1
PF0: Atmega2560.97 LM35.2
PG5: Atmega2560.1 R21.1
"RD + (OBC-ADCS)": J.21 RS.5
"RD - (OBC-ADCS)": J.19 RS.6
RESET: Atmega2560.30 BURN.4 C1.1 R2.2 RST.2
RXD0: FTDI.2
RXD2: Atmega2560.12 RS.2 RX.2
SCK: Atmega2560.20 BURN.3
SCL: Atmega2560.43 J.44 MPU9250.23 R11.2
SDA: Atmega2560.44 J.43 MPU9250.24 R12.2
"TD + (OBC-ADCS)": J.17 R15.2 RS.8
"TD - (OBC-ADCS)": J.15 R15.1 RS.7
TXD0: FTDI.4
TXD2: Atmega2560.13 RS.3 TX.2
"USB D+": FTDI232RL.15 USB.3
"USB D-": FTDI232RL.16 USB.2
"USB V": C70.2 D7.A FTDI232RL.4 FTDI232RL.19 FTDI232RL.20 USB.1
VBAT: J.49 J.51
VCC-3.3V(ADCS): "Gyro PW.2" D5.C POWER.3 R16.1
VCC-5V(ADCS): "Voltage Regulator 3.3V.5" Atmega2560.10 Atmega2560.31 Atmega2560.61 Atmega2560.80 Atmega2560.100 C2.2 C3.2 C4.2 C5.2 C12.1 C20.P C21.1 C22.1 D3.C D7.C J.28 LM35.1 POWER.2 R2.1 R3.1 R4.1 R7.2 R11.1 R12.1 R14.1 RS.1 Servo.2
VCC-9V(ADCS): "Voltage Regulator 5V.5" C15.P C16.1 C17.1 D1.C POWER.1 R10.1
XTAL1: Atmega2560.34 C11.2 R6.1 Y1.2
XTAL2: Atmega2560.33 C10.2 R5.2 Y1.1
pads on no net: "Voltage Regulator 3.3V.6" "Voltage Regulator 5V.6" Atmega2560.2 Atmega2560.3 Atmega2560.4 Atmega2560.8 Atmega2560.9 Atmega2560.14 Atmega2560.15 Atmega2560.16 Atmega2560.17 Atmega2560.18 Atmega2560.19 Atmega2560.23 Atmega2560.24 Atmega2560.25 Atmega2560.26 Atmega2560.27 Atmega2560.28 Atmega2560.29 Atmega2560.35 Atmega2560.36 Atmega2560.37 Atmega2560.38 Atmega2560.39 Atmega2560.40 Atmega2560.41 Atmega2560.42 Atmega2560.45 Atmega2560.46 Atmega2560.47 Atmega2560.48 Atmega2560.49 Atmega2560.50 Atmega2560.51 Atmega2560.52 Atmega2560.53 Atmega2560.54 Atmega2560.55 Atmega2560.56 Atmega2560.57 Atmega2560.58 Atmega2560.59 Atmega2560.60 Atmega2560.63 Atmega2560.64 Atmega2560.65 Atmega2560.66 Atmega2560.67 Atmega2560.68 Atmega2560.69 Atmega2560.70 Atmega2560.71 Atmega2560.72 Atmega2560.73 Atmega2560.74 Atmega2560.75 Atmega2560.76 Atmega2560.77 Atmega2560.78 Atmega2560.79 Atmega2560.82 Atmega2560.83 Atmega2560.84 Atmega2560.85 Atmega2560.86 Atmega2560.87 Atmega2560.88 Atmega2560.89 Atmega2560.90 Atmega2560.91 Atmega2560.92 Atmega2560.93 Atmega2560.94 Atmega2560.95 Atmega2560.96 B?.1 B?.2 B?.3 B?.4 B?.5 B?.6 B?.7 B?.8 B?.9 FTDI232RL.3 FTDI232RL.6 FTDI232RL.9 FTDI232RL.10 FTDI232RL.12 FTDI232RL.13 FTDI232RL.14 FTDI232RL.22 FTDI232RL.23 FTDI232RL.27 FTDI232RL.28 J.01 J.02 J.03 J.04 J.05 J.06 J.07 J.08 J.09 J.13 J.18 J.22 J.23 J.24 J.25 J.26 J.27 J.33 J.34 J.35 J.36 J.37 J.38 J.39 J.40 J.41 J.42 J.47 J.48 MAX471.6 MAX471.7 MAX471.9 MPU9250.2 MPU9250.3 MPU9250.4 MPU9250.5 MPU9250.6 MPU9250.7 MPU9250.9 MPU9250.11 MPU9250.12 MPU9250.14 MPU9250.15 MPU9250.16 MPU9250.17 MPU9250.19 MPU9250.21 MPU9250.22 MPU9250.25 USB.4 USB.S1 USB.S2 USB.S3 USB.S4 USB.S5 USB.S6

## Polygon pours and split planes (outlines as drawn)
G on Ground (split plane): 175 vertices, not listed, extent -4.401,-4.541 90.031,84.741
VCC-5V(ADCS) on Power (split plane): 175 vertices, not listed, extent -4.401,-4.541 90.031,84.741

## Silkscreen, mask and mechanical layers (free items; w line width, h text height)
Top Overlay:
  text "5V/" at 78.715,62.001 h0.64
  text "GND/GND" at 77.292,59.461 h0.64
  text "9V/" at 79.197,56.972 h0.64
  text "GND/TD-" at 77.241,54.331 h0.64
  text "/TD+" at 79.121,51.943 h0.64
  text "3.3V/RD-" at 76.886,49.378 h0.64
  text "/RD+" at 79.172,46.761 h0.64
  text "PE3" at -3.708,41.837 h0.64
  text "5V" at -3.2,39.221 h0.64
  text "AD5V/" at 77.47,39.192 h0.64
  text "GND/GND" at 77.445,36.754 h0.64
  text "GND" at -3.607,36.63 h0.64
  text "GND/GND" at 77.445,34.011 h0.64
  text "RST" at -3.734,31.572 h0.64
  text "SCK" at -3.835,28.905 h0.64
  text "MOSI" at -3.81,26.391 h0.64
  text "MISO" at -3.937,23.851 h0.64
  text "9V" at -3.734,18.593 h0.64
  text "GND/GND" at 77.368,16.231 h0.64
  text "5V" at -3.759,15.977 h0.64
  text "3.3V" at -4.039,13.487 h0.64
  text "GND/VBAT" at 76.784,11.201 h0.64
  text "AD3.3V" at -4.42,10.922 h0.51
  text "GND/VBAT" at 76.784,8.56 h0.64
  text "AD5V" at -4.013,8.357 h0.64
  text "AD9V" at -4.115,5.918 h0.64
Mechanical 1:
  lines w0.254: -4.91,-3.05 ccw(c-3.91,-3.05) -3.91,-4.05 2.9,-4.05 cw(c2.9,-5.668) 4.044,-4.524 4.096,-4.576 ccw(c5.24,-3.432) 5.24,-5.05 57.73,-5.05 ccw(c57.73,-3.831) 58.592,-4.693 60.158,-3.127 cw(c61.02,-3.989) 61.02,-2.77 89.54,-2.77 ccw(c89.54,-1.77) 90.54,-1.77 90.54,7.25 ccw(c89.248,7.25) 90.162,8.163 89.625,8.7 88.952,9.373 cw(c89.728,10.15) 88.63,10.15 88.63,67.85 cw(c90.996,67.85) 89.323,69.523 89.797,69.997 ccw(c88.124,71.67) 90.49,71.67 90.49,79.54 ccw(c89.49,79.54) 89.49,80.54 81.75,80.54 cw(c81.75,83.22) 79.855,81.325 76.715,84.465 ccw(c74.82,82.57) 74.82,85.25 7.44,85.25 7.302,85.25 ccw(c7.302,83.543) 6.095,84.75 cw(c4.888,85.957) 4.888,84.25 4.75,84.25 -3.91,84.25 ccw(c-3.91,83.25) -4.91,83.25 -4.91,-3.05

## Text inside footprints (layer, text, board x,y; h text height)
USB: Mechanical 13 "PCB EDGE" at 22.849,0.691 h0.41 r180